# Altium PCB PCB1.PcbDoc
Units mm, origin at the board's own origin, x right, y up, seen from the top; angles counter-clockwise.
Board outline 24.5 x 31.5 mm, 2 copper layers (Top Layer, Bottom Layer); 15 components, 16 nets, 51 pads, 32 vias.
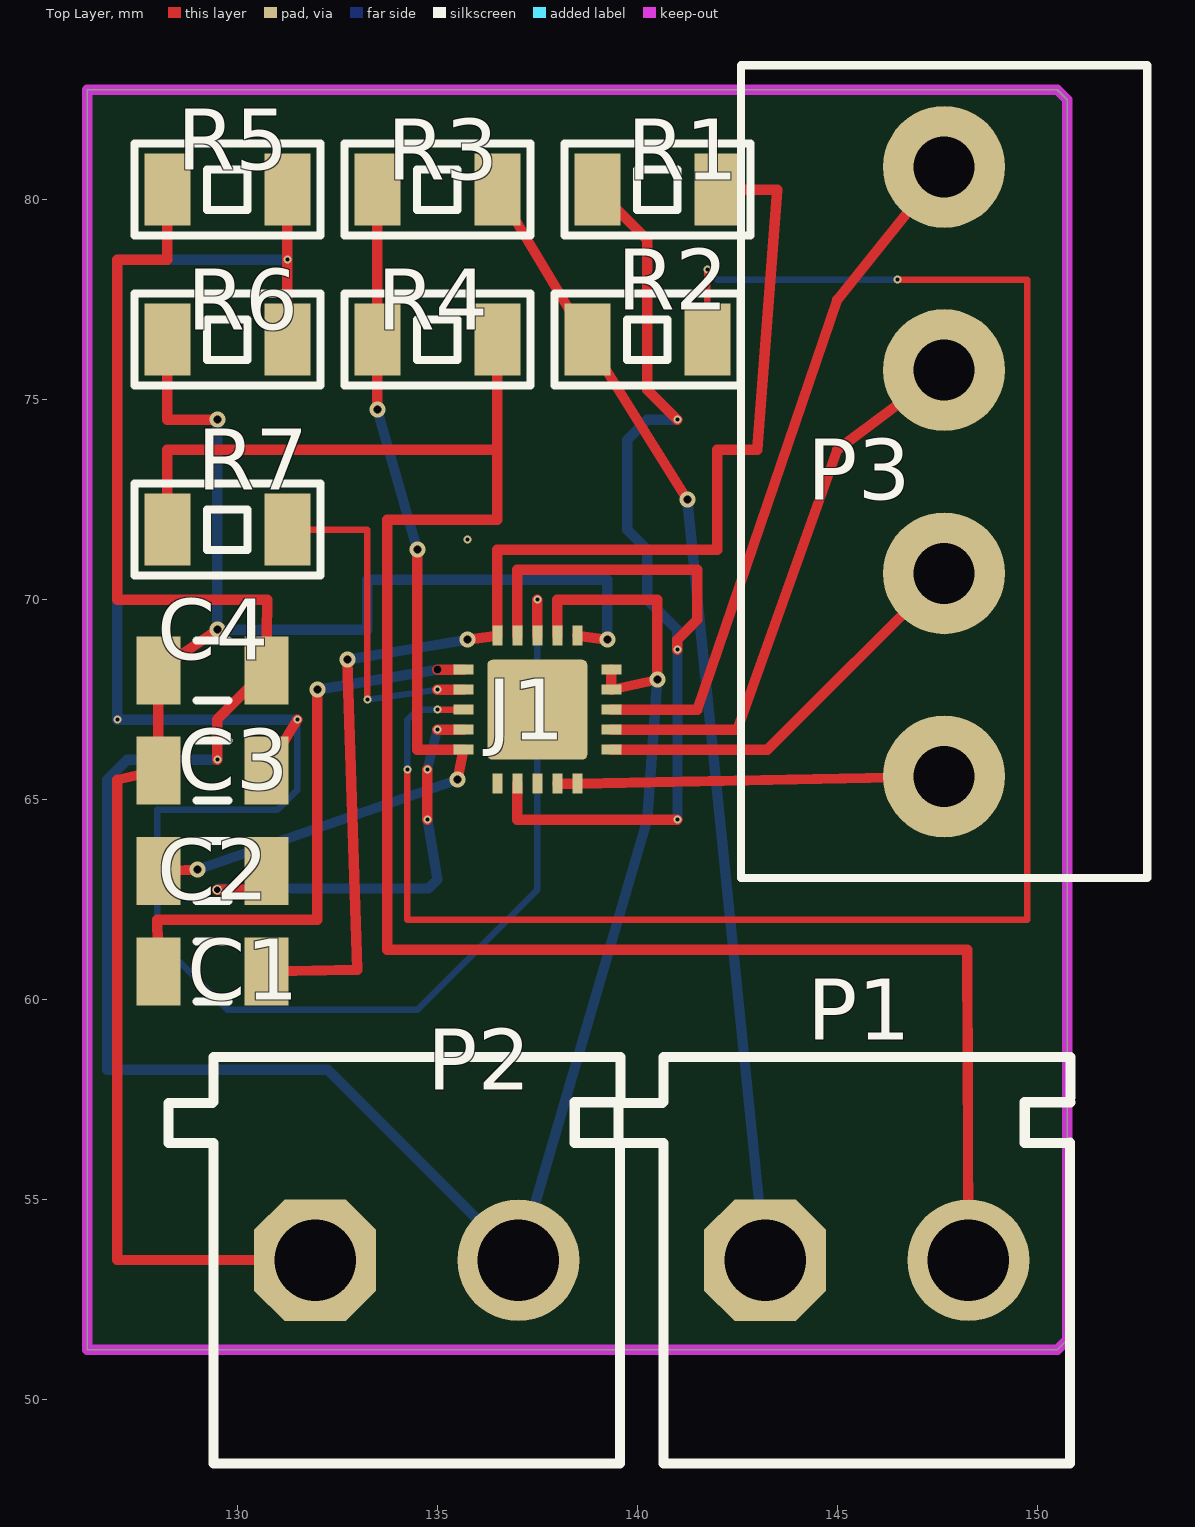
[diagram p0: Top Layer view]
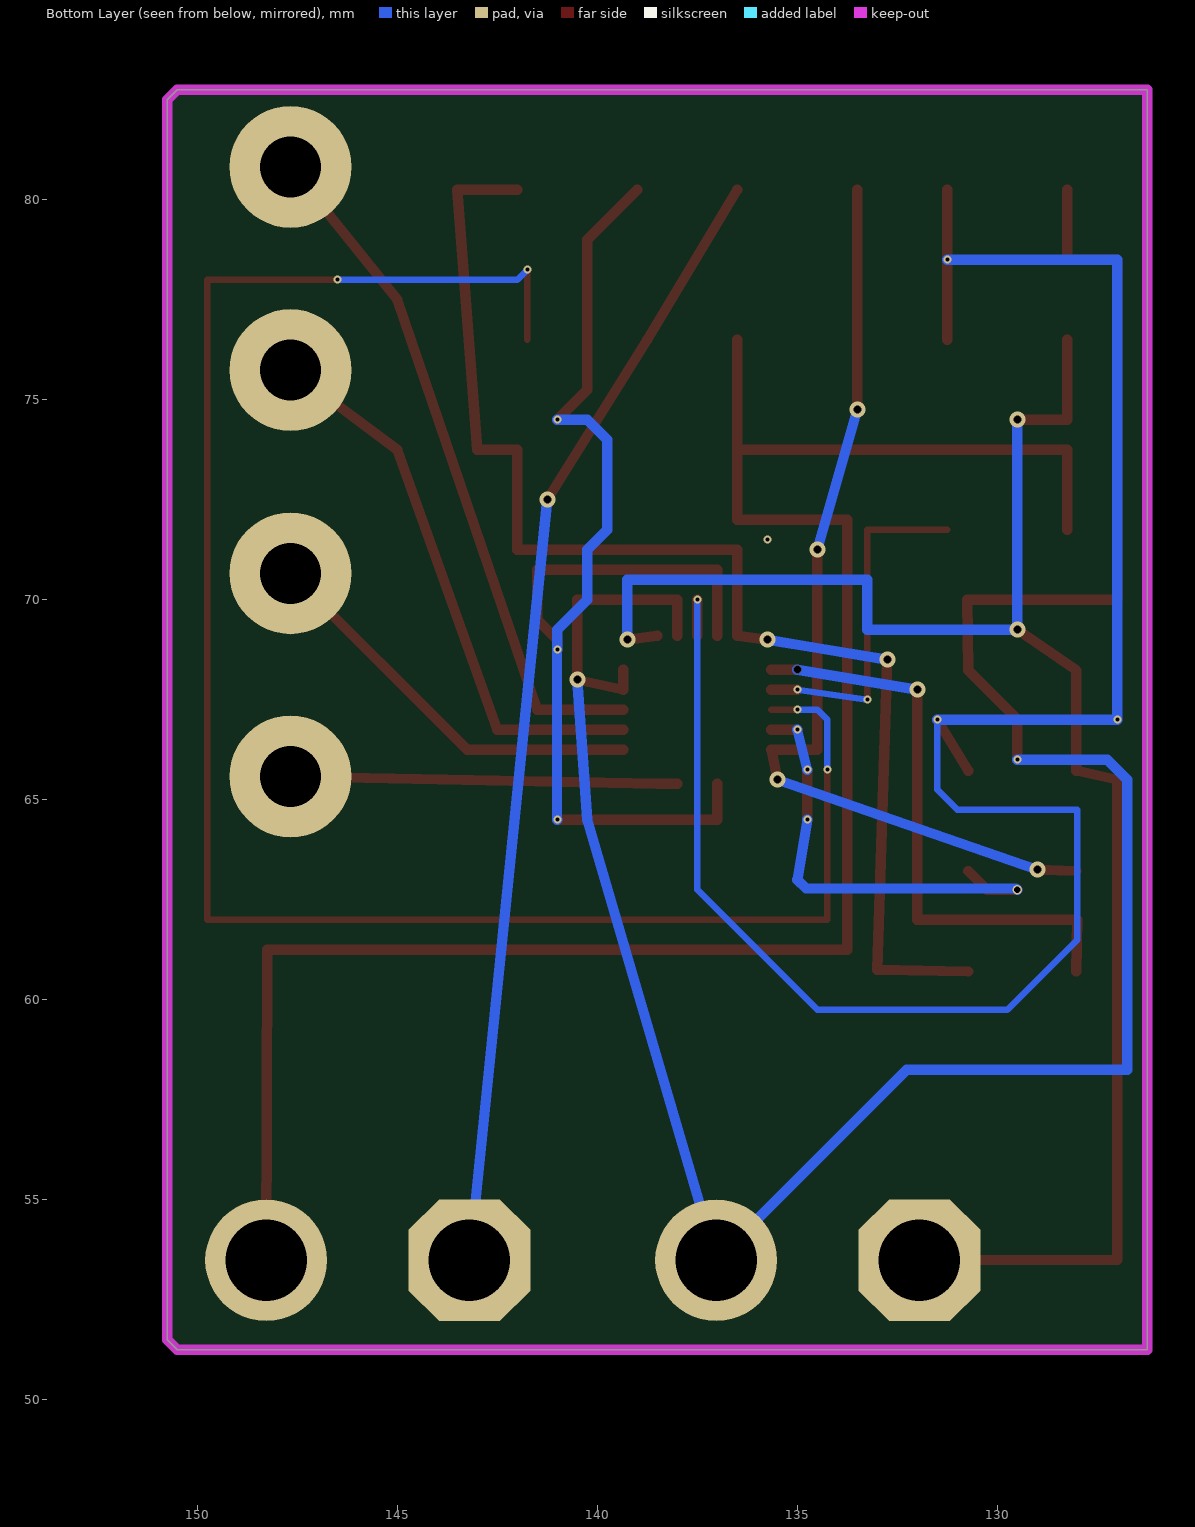
[diagram p1: Bottom Layer view, seen from below]

## Layer stack, top to bottom
Top Layer: signal copper 0.0356
Dielectric: dielectric 0.32, FR-4, Dk 4.8
Bottom Layer: signal copper 0.0356

## Board outline
126.25,51.25 126.25,82.75 150.5,82.75 150.75,82.5 150.75,51.5 150.5,51.25

## Design rules (kind name [scope] priority, off if disabled: settings)
Clearance [All] p1: gap=0.178
PolygonConnect [All] p1: connectstyle=Relief reliefconductorwidth=0.254 reliefentries=4 polygonreliefangle="90 Angle" airgapwidth=0.254
RoutingVias [All] p1: holewidth=0.711 width=1.27 viastyle="Through Hole" minholewidth=0.711 minwidth=1.27 maxholewidth=0.711 maxwidth=1.27
SolderMaskExpansion [All] p1: expansion=0.102
Width [All] p1: maxlimit=0.254 minlimit=0.15 preferedwidth=0.254
28 further rules are at their usual default settings.

## Components (designator, comment, footprint, x,y, rotation, side; value= is the part's Value field where it differs from the comment)
C1 "0.22uF" C1206 129.375,60.71 r0 top
C2 "1nF" C1206 129.375,63.218 r0 top
C3 "0.1uF" C1206 129.375,65.726 r0 top
C4 "0.1uF" C1206 129.375,68.234 r0 top
J1 "AD8232" LFCSP_20 137.5,67.25 r0 top
P1 "ELECTRONIC INTERFACE" "Terminal 2pin" 145.75,53.5 r0 top
P2 "Terminal 2pin" "Terminal 2pin" 134.5,53.5 r0 top
P3 "Terminal 4PIN" "Terminal 4Pin" 148.25,73 r270 top (schematic designator P?)
R1 "10M" R_1206 140.5,80.25 r0 top
R2 "180K" R_1206 140.25,76.5 r0 top
R3 "10M" R_1206 135,80.25 r0 top
R4 "10M" R_1206 135,76.5 r0 top
R5 "10M" R_1206 129.75,80.25 r0 top
R6 "10M" R_1206 129.75,76.5 r0 top
R7 "180K" R_1206 129.75,71.75 r0 top

## Footprints (in the part's own frame and the unit in brackets; to place one, negate y for a bottom-side part, rotate by r counter-clockwise, add the part's x,y. Pads: shape width x height; smd on the part's side, far side on the other; paste and mask are expansions set on the pad)
C1206 [mm] "Chip Capacitor, Body 3.2x1.6mm, IPC High Density"
  rect 1.1x1.7 smd: 1(-1.35,0) 2(1.35,0)
  silkscreen extent -0.4,-0.75 0.4,0.75, body extent -1.7,-0.9 1.7,0.9, height 1.3
LFCSP_20 [mm]
  rect 0.5x0.25 smd: 1(-1.85,1) 2(-1.85,0.5) 3(-1.85,0) 4(-1.85,-0.5) 5(-1.85,-1) 11(1.85,-1) 12(1.85,-0.5) 13(1.85,0) 14(1.85,0.5) 15(1.85,1)
  rect 0.25x0.5 smd: 6(-1,-1.85) 7(-0.5,-1.85) 8(0,-1.85) 9(0.5,-1.85) 10(1,-1.85) 16(1,1.85) 17(0.5,1.85) 18(0,1.85) 19(-0.5,1.85) 20(-1,1.85)
  rrect10% 2.5x2.5 smd paste-2: PAD(0,0)
R_1206 [mm]
  rect 1.15x1.8 smd: 1(-1.5,0) 2(1.5,0)
  silkscreen extent -2.32,-1.15 2.33,1.15, body extent -1.6,-0.8 1.6,0.8, height 1
"Terminal 2pin" [mil]
  oct 120x120 hole 80: 1(-100.5,-0.5)
  round 120 hole 80: 2(99.5,-0.5)
  silkscreen extent -245,-200 200,200, body extent -215,-154 199,150, height 413
"Terminal 4Pin" [mil]
  round 120 hole 60: 1(-307.92,-22.85) 2(-107.92,-22.85) 3(92.08,-22.85) 4(292.08,-22.85)
  silkscreen extent -408,-223 392,177, body extent -407,-174 404,129, height 394

## Part data
C1 C2 C3 C4: library part "Cap 100nF"
J1: "AD8232 Analog Front End Evaluation Board"
P1: library part "Terminal 2pin"
R1 R2 R3 R4 R5 R6 R7: library part RES

## Via types
v1: diameter 0.2, hole 0.1, Top Layer to Bottom Layer, 18 vias
v2: diameter 0.4, hole 0.2, Top Layer to Bottom Layer, 12 vias
v3: diameter 0.2, hole 0.2, Top Layer to Bottom Layer, 1 vias
v4: diameter 0.24, hole 0.17, Top Layer to Bottom Layer, 1 vias

## Nets (pads, with @x,y where several pads share a name; then routed paths per layer and width w, separated by ;. In a path a pad name is that pad's centre, name@x,y a point inside that pad or via, vN(x,y) a via of type N, cw(c..) or ccw(c..) an arc to the next point about the centre after c; other vN are vias at no path point)
"A TO SIGNAL INTERFACE": J1.13 P3.1 | length 17.2
  Top Layer w0.254: J1.13 141.5,67.25 145,77.5 P3.1
"B TO SIGNAL INTERFACE": J1.12 P3.2 | length 13.9
  Top Layer w0.254: J1.12 142.5,66.75 145,73.75 P3.2
"C TO SIGNAL INTERFACE": J1.11 P3.3 | length 10.1
  Top Layer w0.254: J1.11 143.25,66.25 P3.3
GND: C3.1 C4.1 J1.16 P2.1 R6.1 | length 44.1
  Top Layer w0.254: R6.1 128.25,74.5 v2(129.5,74.5) ; v2(129.5,69.25) C4.1 C3.1 127,65.5 127,53.5 P2.1 ; J1.16 v2(139.25,69)
  Bottom Layer w0.254: v2(129.5,74.5) v2(129.5,69.25) 133.25,69.25 133.25,70.5 139.25,70.5 v2(139.25,69)
NetC1_1: C1.1 J1.1 | length 14.7
  Top Layer w0.254: C1.1 128,62 132,62 v2(132,67.75) ; v3(135,68.25) J1.1
  Bottom Layer w0.254: v2(132,67.75) v3(135,68.25)
NetC1_2: C1.2 J1.20 R1.2 | length 33
  Top Layer w0.254: C1.2 133,60.75 v2(132.75,68.5) ; v2(135.75,69) J1.20 136.5,71.25 142,71.25 142,73.75 143,73.75 143.5,80.25 R1.2
  Bottom Layer w0.254: v2(132.75,68.5) 134.659,68.818 v2(135.75,69)
NetC2_1: C2.1 J1.5 R3.1 R4.1 | length 23.9
  Top Layer w0.254: C2.1 v2(129,63.25) ; v2(133.5,74.75) R4.1 R3.1 ; v2(134.5,71.25) 134.5,66.25 J1.5 v2(135.5,65.5)
  Bottom Layer w0.254: v2(129,63.25) v2(135.5,65.5) ; v2(133.5,74.75) v2(134.5,71.25)
NetC2_2: C2.2 J1.4 | length 11.5
  Top Layer w0.254: v4(129.5,62.75) 130.257,62.75 C2.2 ; v1(134.75,64.5) v1(134.75,65.75) ; v1(135,66.75) J1.4
  Bottom Layer w0.254: v4(129.5,62.75) 129.534,62.784 134.784,62.784 135,63 v1(134.75,64.5) ; v1(134.75,65.75) v1(135,66.75)
NetC3_2: C3.2 J1.18 R5.2 R6.2 | length 53.8
  Top Layer w0.254: C3.2 v1(131.5,67) ; R6.2 v1(131.25,78.5) R5.2 ; J1.18 v1(137.5,70)
  Bottom Layer w0.17: v1(131.5,67) 131.5,65.25 131,64.75 128,64.75 128,61.5 129.75,59.75 134.5,59.75 137.5,62.75 v1(137.5,70)
  Bottom Layer w0.254: v1(131.25,78.5) 127,78.5 v1(127,67) v1(131.5,67)
NetJ1_2: J1.2 R7.2 | length 8.7
  Top Layer w0.17: R7.2 133.25,71.75 v1(133.25,67.5)
  Top Layer w0.254: v1(135,67.75) J1.2
  Bottom Layer w0.17: v1(133.25,67.5) v1(135,67.75)
NetJ1_3: J1.3 R2.2 | length 47.9
  Top Layer w0.17: v1(134.25,65.75) 134.25,62 149.75,62 149.75,78 v1(146.5,78) ; v1(135,67.25) J1.3 ; R2.2 v1(141.75,78.25)
  Bottom Layer w0.17: v1(134.25,65.75) 134.25,67 134.5,67.25 v1(135,67.25) ; v1(141.75,78.25) 142,78 v1(146.5,78)
NetJ1_7: J1.7 J1.19 R1.1 | length 31.3
  Top Layer w0.254: J1.7 137,64.5 v1(141,64.5) ; J1.19 137,70.75 141.5,70.75 141.5,69.5 141,69 v1(141,68.75) ; R1.1 140.25,79 140.25,76.25 140.25,75.25 v1(141,74.5)
  Bottom Layer w0.254: v1(141,64.5) 141.005,64.505 141.005,68.745 v1(141,68.75) 141,69.25 140.25,70 140.25,71.25 139.75,71.75 139.75,74 140.25,74.5 v1(141,74.5)
NetP1_1: P1.1 R2.1 R3.2 | length 28.2
  Top Layer w0.254: R3.2 R2.1 v2(141.25,72.5)
  Bottom Layer w0.254: v2(141.25,72.5) P1.1
NetP1_2: P1.2 R4.2 R7.1 | length 50.5
  Top Layer w0.254: R7.1 128.25,73.75 136.5,73.75 ; R4.2 136.5,73.75 ; P1.2 148.249,61.25 133.75,61.25 133.75,72 136.5,72 136.5,73.75
"SIGNAL OUT PUT": J1.9 J1.10 P3.4 | length 9.7
  Top Layer w0.254: J1.9 J1.10 P3.4
VCC: C4.2 J1.14 J1.15 J1.17 P2.2 R5.1 | length 64.3
  Top Layer w0.254: R5.1 128.25,78.5 127,78.5 127,70 130.75,70 C4.2 129.5,67.009 v1(129.5,66) ; J1.17 138,70 140.5,70 v2(140.5,68) J1.14 J1.15
  Bottom Layer w0.254: v1(129.5,66) 127.25,66 126.75,65.5 126.75,58.25 132.265,58.25 P2.2 140.25,64.5 v2(140.5,68)
pads on no net: J1.6 J1.8 J1.PAD
copper on no net:
  other v1: 135.75,71.5

## Keep-outs
Keep-Out Layer:
  the board outline again, w0.254